# EAGLE board RPIBoy_Compute_1_3 (EAGLE 9.4.0), part 1 of 2
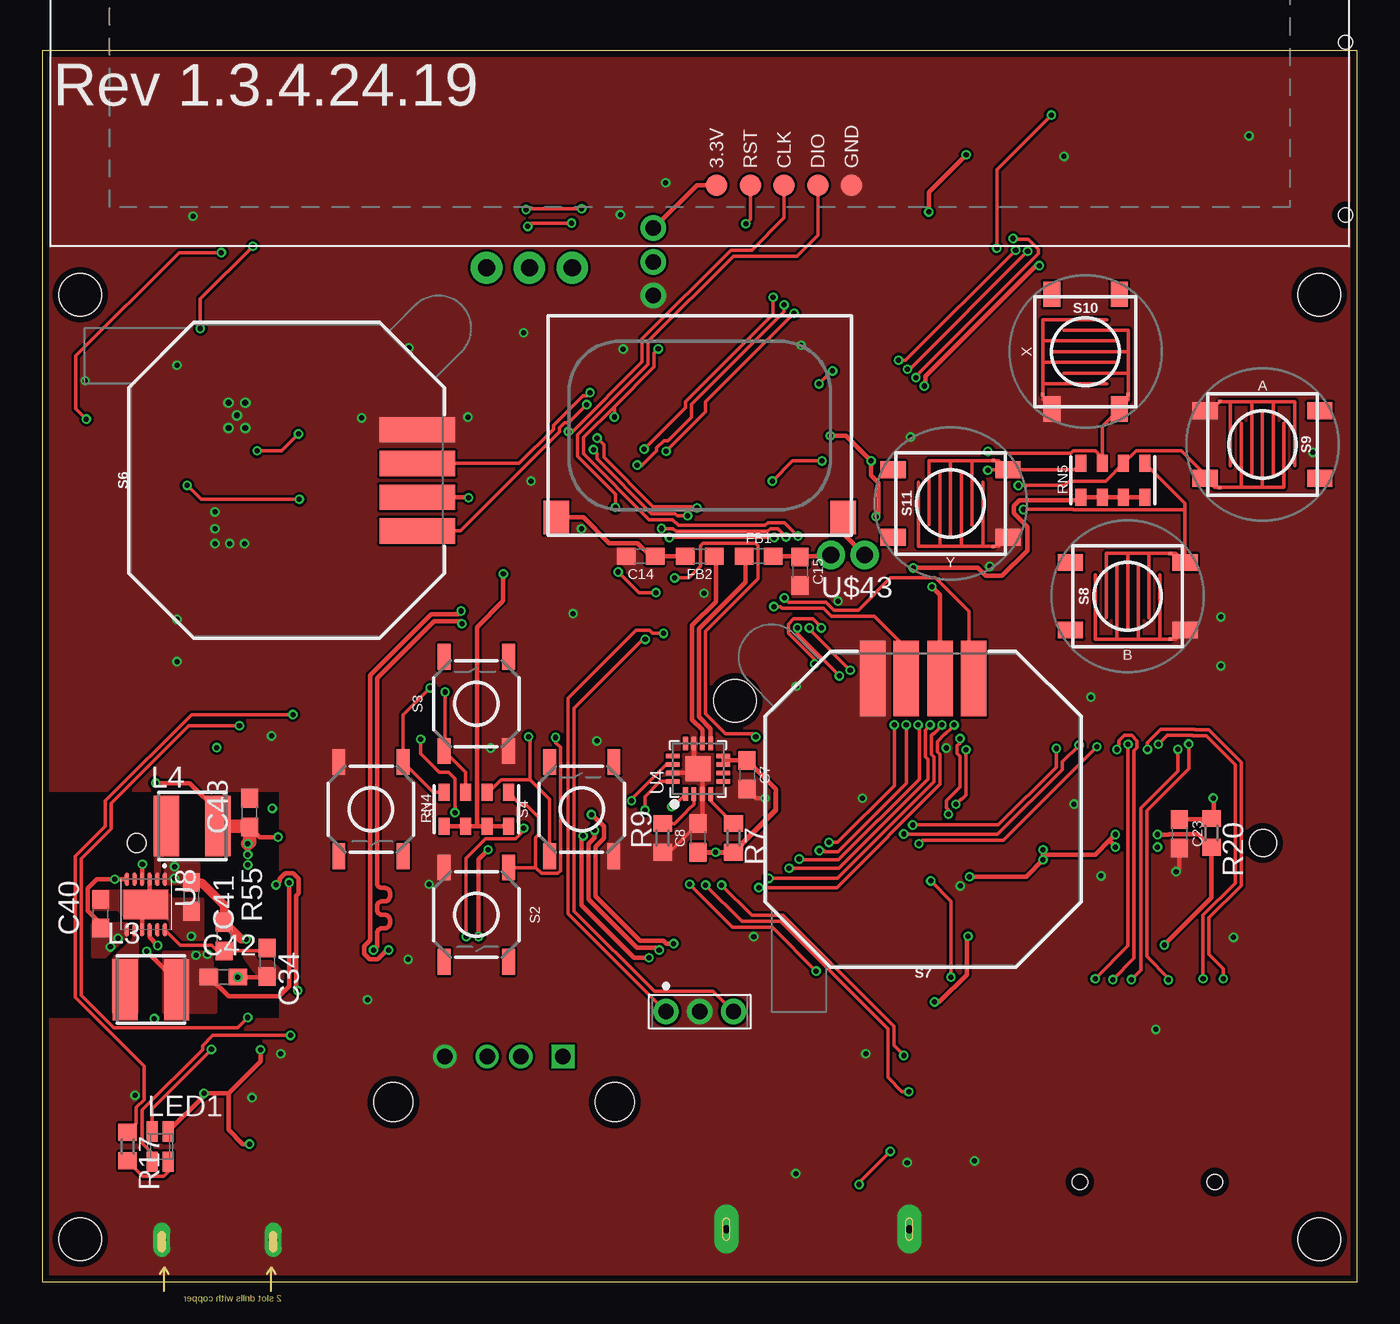
[diagram p0: board, top side]
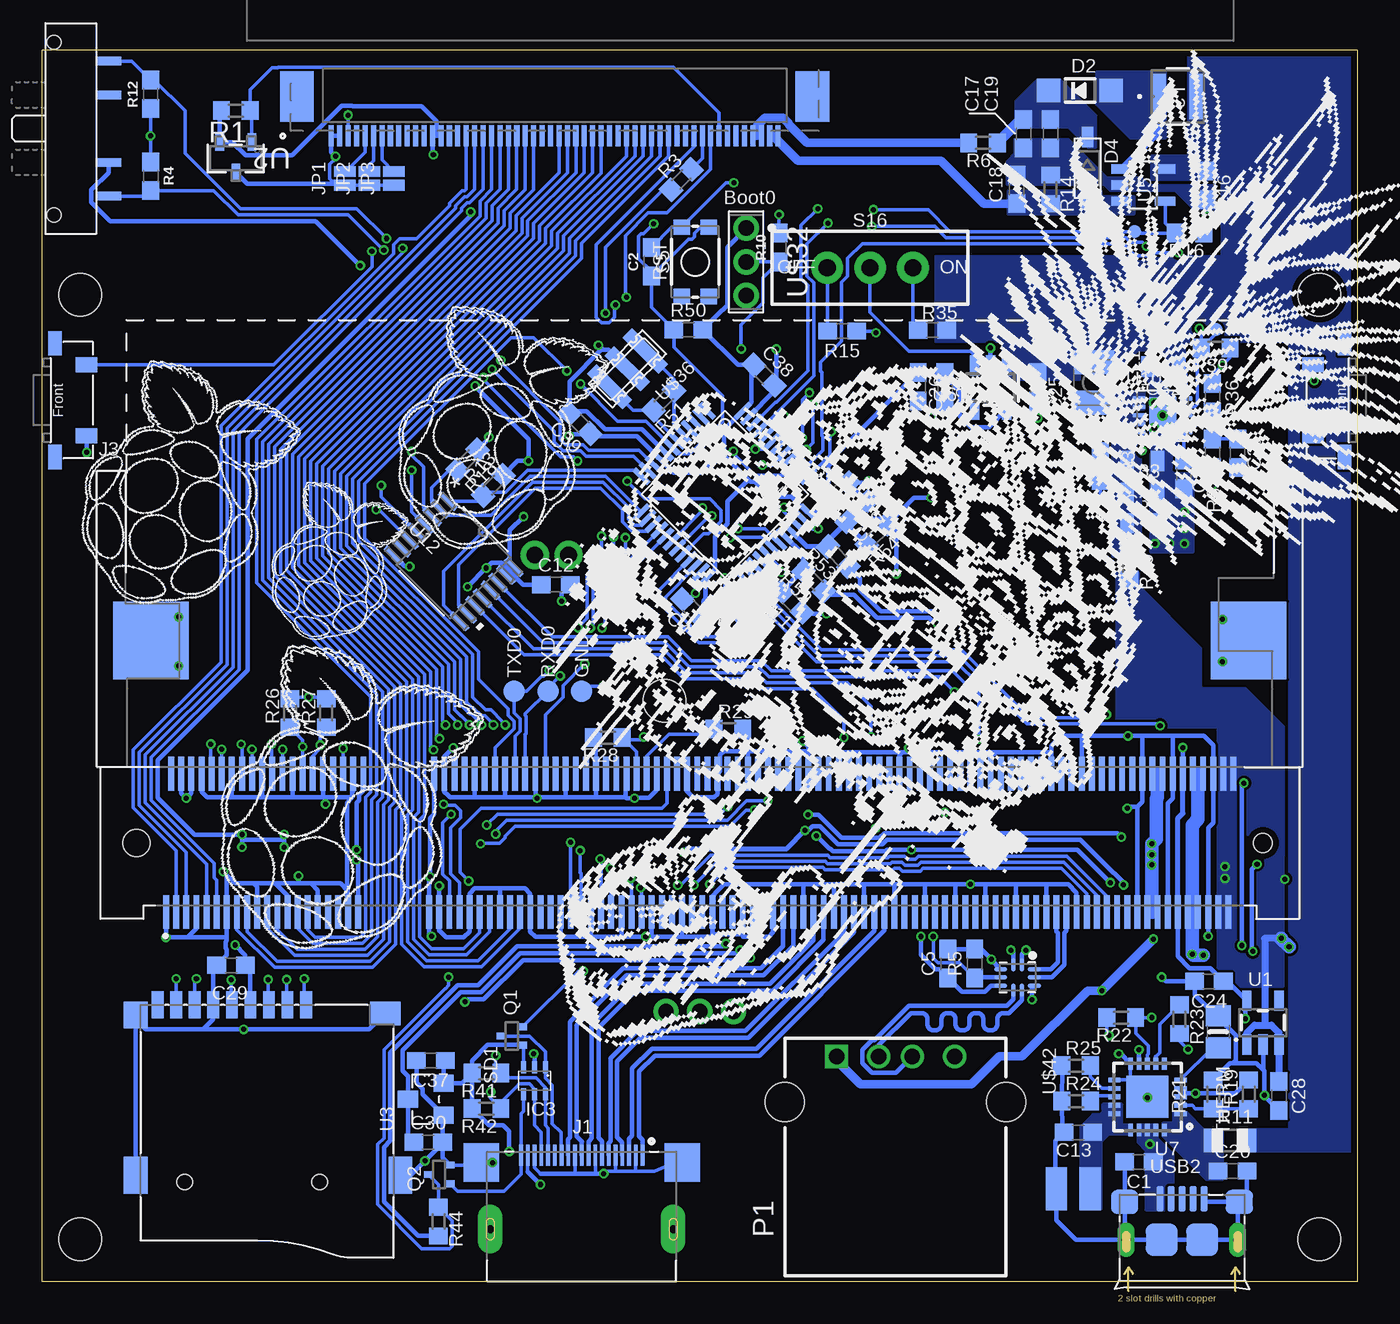
[diagram p1: board, bottom side, seen from below]

Size 78 x 73 mm. Coordinates in mm from the lower left corner, seen from the top.
Outline: 0,0 78,0 78,73 0,73 0,0
Copper layers (1*16): Top 0.035559375mm / dielectric 1.6mm / Bottom 0.035559375mm
Design rules "oshpark_2layer *": minimum track width 8mil, minimum drill 0.3mm, track to track 6mil, track to pad 6mil, pad to pad 6mil, via to via 6mil, smd to smd 6mil, copper to edge 15mil, drill to drill 6mil, minimum pad ring 5mil, minimum via ring 5mil, stop-mask expansion 2.5mil, vias tented up to drill 0mil, thermal gap 10mil
Net classes: 1 diff_pair: width 0.254 mm
Holes 2.5 mm at 2.25,2.5 75.75,2.5 2.25,58.5 75.75,58.5 41.09,34.42
tKeepout: area -0.5,0 to 4.5,5; area 73.5,0 to 78.5,5; area -0.3,56 to 4.7,61; area 73.3,56 to 78.3,61
bKeepout: area 0.1,56.4 to 4.3,60.6; area 73.7,56.4 to 77.9,60.6; area -0.5,0 to 4.5,5; area 73.5,0 to 78.5,5

## Footprints (pad centres in the part's own frame; a part is rotated, then mirrored left to right if it is on the bottom)
TACTILE_SWITCH_6X6.5MM = smd 1.5 x 1: A -3.4,2; A' 3.4,2; B -3.4,-2; B' 3.4,-2
0603 = smd 1.1 x 1: 1 -0.85,0; 2 0.85,0
0805 = smd 0.8 x 1.2: 1 -0.9,0; 2 0.9,0
SOD-123 = smd 1.4 x 1.4: A 1.85,0; C -1.85,0
SOD-123' = smd 1.2 x 0.7: A 1.85,0; C -1.85,0
LQFP48 = smd 0.3 x 1.2: 1 -2.75,-4.25; 2 -2.25,-4.25; 3 -1.75,-4.25; 4 -1.25,-4.25; 5 -0.75,-4.25; 6 -0.25,-4.25; 7 0.25,-4.25; 8 0.75,-4.25; 9 1.25,-4.25; 10 1.75,-4.25; 11 2.25,-4.25; 12 2.75,-4.25; 25 2.75,4.25; 26 2.25,4.25; 27 1.75,4.25; 28 1.25,4.25; 29 0.75,4.25; 30 0.25,4.25; 31 -0.25,4.25; 32 -0.75,4.25; 33 -1.25,4.25; 34 -1.75,4.25; 35 -2.25,4.25; 36 -2.75,4.25 | smd 1.2 x 0.3: 13 4.25,-2.75; 14 4.25,-2.25; 15 4.25,-1.75; 16 4.25,-1.25; 17 4.25,-0.75; 18 4.25,-0.25; 19 4.25,0.25; 20 4.25,0.75; 21 4.25,1.25; 22 4.25,1.75; 23 4.25,2.25; 24 4.25,2.75; 37 -4.25,2.75; 38 -4.25,2.25; 39 -4.25,1.75; 40 -4.25,1.25; 41 -4.25,0.75; 42 -4.25,0.25; 43 -4.25,-0.25; 44 -4.25,-0.75; 45 -4.25,-1.25; 46 -4.25,-1.75; 47 -4.25,-2.25; 48 -4.25,-2.75
SOT363-INFINION = smd 0.3 x 0.7: 1 -0.65,-0.8; 2 0,-0.8; 3 0.65,-0.8; 4 0.65,0.8; 5 0,0.8; 6 -0.65,0.8
TE_2013978-1 = smd 0.22 x 1.25: 1 3.6,4.375; 2 3.2,4.375; 3 2.8,4.375; 4 2.4,4.375; 5 2,4.375; 6 1.6,4.375; 7 1.2,4.375; 8 0.8,4.375; 9 0.4,4.375; 10 0,4.375; 11 -0.4,4.375; 12 -0.8,4.375; 13 -1.2,4.375; 14 -1.6,4.375; 15 -2,4.375; 16 -2.4,4.375; 17 -2.8,4.375; 18 -3.2,4.375; 19 -3.6,4.375 | smd 2.1 x 2.3: SH1 -5.95,3.95; SH2 5.95,3.95 | drill 0.45 pad 1.45 long: SH3 -5.425,0; SH4 5.425,0
TE_1473005-4 = smd 0.35 x 2: 1 -31.65,-4.1; 2 -31.35,4.1; 3 -31.05,-4.1; 4 -30.75,4.1; 5 -30.45,-4.1; 6 -30.15,4.1; 7 -29.85,-4.1; 8 -29.55,4.1; 9 -29.25,-4.1; 10 -28.95,4.1; 11 -28.65,-4.1; 12 -28.35,4.1; 13 -28.05,-4.1; 14 -27.75,4.1; 15 -27.45,-4.1; 16 -27.15,4.1; 17 -26.85,-4.1; 18 -26.55,4.1; 19 -26.25,-4.1; 20 -25.95,4.1; 21 -25.65,-4.1; 22 -25.35,4.1; 23 -25.05,-4.1; 24 -24.75,4.1; 25 -24.45,-4.1; 26 -24.15,4.1; 27 -23.85,-4.1; 28 -23.55,4.1; 29 -23.25,-4.1; 30 -22.95,4.1; 31 -22.65,-4.1; 32 -22.35,4.1; 33 -22.05,-4.1; 34 -21.75,4.1; 35 -21.45,-4.1; 36 -21.15,4.1; 37 -20.85,-4.1; 38 -20.55,4.1; 39 -20.25,-4.1; 40 -19.95,4.1; 41 -16.05,-4.1; 42 -15.75,4.1; 43 -15.45,-4.1; 44 -15.15,4.1; 45 -14.85,-4.1; 46 -14.55,4.1; 47 -14.25,-4.1; 48 -13.95,4.1; 49 -13.65,-4.1; 50 -13.35,4.1; 51 -13.05,-4.1; 52 -12.75,4.1; 53 -12.45,-4.1; 54 -12.15,4.1; 55 -11.85,-4.1; 56 -11.55,4.1; 57 -11.25,-4.1; 58 -10.95,4.1; 59 -10.65,-4.1; 60 -10.35,4.1; 61 -10.05,-4.1; 62 -9.75,4.1; 63 -9.45,-4.1; 64 -9.15,4.1; 65 -8.85,-4.1; 66 -8.55,4.1; 67 -8.25,-4.1; 68 -7.95,4.1; 69 -7.65,-4.1; 70 -7.35,4.1; 71 -7.05,-4.1; 72 -6.75,4.1; 73 -6.45,-4.1; 74 -6.15,4.1; 75 -5.85,-4.1; 76 -5.55,4.1; 77 -5.25,-4.1; 78 -4.95,4.1; 79 -4.65,-4.1; 80 -4.35,4.1; 81 -4.05,-4.1; 82 -3.75,4.1; 83 -3.45,-4.1; 84 -3.15,4.1; 85 -2.85,-4.1; 86 -2.55,4.1; 87 -2.25,-4.1; 88 -1.95,4.1; 89 -1.65,-4.1; 90 -1.35,4.1; 91 -1.05,-4.1; 92 -0.75,4.1; 93 -0.45,-4.1; 94 -0.15,4.1; 95 0.15,-4.1; 96 0.45,4.1; 97 0.75,-4.1; 98 1.05,4.1; 99 1.35,-4.1; 100 1.65,4.1; 101 1.95,-4.1; 102 2.25,4.1; 103 2.55,-4.1; 104 2.85,4.1; 105 3.15,-4.1; 106 3.45,4.1; 107 3.75,-4.1; 108 4.05,4.1; 109 4.35,-4.1; 110 4.65,4.1; 111 4.95,-4.1; 112 5.25,4.1; 113 5.55,-4.1; 114 5.85,4.1; 115 6.15,-4.1; 116 6.45,4.1; 117 6.75,-4.1; 118 7.05,4.1; 119 7.35,-4.1; 120 7.65,4.1; 121 7.95,-4.1; 122 8.25,4.1; 123 8.55,-4.1; 124 8.85,4.1; 125 9.15,-4.1; 126 9.45,4.1; 127 9.75,-4.1; 128 10.05,4.1; 129 10.35,-4.1; 130 10.65,4.1; 131 10.95,-4.1; 132 11.25,4.1; 133 11.55,-4.1; 134 11.85,4.1; 135 12.15,-4.1; 136 12.45,4.1; 137 12.75,-4.1; 138 13.05,4.1; 139 13.35,-4.1; 140 13.65,4.1; 141 13.95,-4.1; 142 14.25,4.1; 143 14.55,-4.1; 144 14.85,4.1; 145 15.15,-4.1; 146 15.45,4.1; 147 15.75,-4.1; 148 16.05,4.1; 149 16.35,-4.1; 150 16.65,4.1; 151 16.95,-4.1; 152 17.25,4.1; 153 17.55,-4.1; 154 17.85,4.1; 155 18.15,-4.1; 156 18.45,4.1; 157 18.75,-4.1; 158 19.05,4.1; 159 19.35,-4.1; 160 19.65,4.1; 161 19.95,-4.1; 162 20.25,4.1; 163 20.55,-4.1; 164 20.85,4.1; 165 21.15,-4.1; 166 21.45,4.1; 167 21.75,-4.1; 168 22.05,4.1; 169 22.35,-4.1; 170 22.65,4.1; 171 22.95,-4.1; 172 23.25,4.1; 173 23.55,-4.1; 174 23.85,4.1; 175 24.15,-4.1; 176 24.45,4.1; 177 24.75,-4.1; 178 25.05,4.1; 179 25.35,-4.1; 180 25.65,4.1; 181 25.95,-4.1; 182 26.25,4.1; 183 26.55,-4.1; 184 26.85,4.1; 185 27.15,-4.1; 186 27.45,4.1; 187 27.75,-4.1; 188 28.05,4.1; 189 28.35,-4.1; 190 28.65,4.1; 191 28.95,-4.1; 192 29.25,4.1; 193 29.55,-4.1; 194 29.85,4.1; 195 30.15,-4.1; 196 30.45,4.1; 197 30.75,-4.1; 198 31.05,4.1; 199 31.35,-4.1; 200 31.65,4.1 | smd 4.5 x 4.6: S1 -32.55,12; S2 32.55,12 | hole 1.6: -33.4,0 | hole 1.1: 33.4,0
SMT-JUMPER_2_NO_NO-SILK = smd 0.635 x 1.27: 1 -0.406,0; 2 0.406,0
L2825P = smd 1.4 x 2.4: 1 -1.2,0; 2 1.2,0
IND_TAIYO_NR3015 = smd 0.8 x 2.692: 1 -1.099,0; 2 1.099,0
INDP4040X180N = smd 1.5 x 3.6: 1 -1.525,0; 2 1.525,0
GM1WA55311A = smd 0.65 x 1.2: 1 -0.475,0.9; 2 -0.475,-0.9; 3 0.475,-0.9; 4 0.475,0.9
OST_USB-A1HSW6 = drill 0.92 square: 1 -3.5,6.51 | drill 0.92: 2 -1,6.51; 3 1,6.51; 4 3.5,6.51 | hole 2.3: -6.57,3.8; 6.57,3.8
SOT523 = smd 0.4 x 0.5: 1 -0.55,-0.65; 2 0.55,-0.65; 3 0,0.65
R0603 = smd 1 x 1.1: 1 -0.85,0; 2 0.85,0
R0805 = smd 1.1 x 1.4: 1 -1,0; 2 1,0
0805-ARV = smd 0.65 x 1: 1 -1.905,-1; 2 -0.635,-1; 3 0.635,-1; 4 1.905,-1; 5 1.905,1; 6 0.635,1; 7 -0.635,1; 8 -1.905,1
TACTILE_SWITCH_SMD_5.2MM = smd 1.524 x 0.762: 1 -2.794,1.905; 2 2.794,1.905; 3 -2.794,-1.905; 4 2.794,-1.905
TACTILE_SWITCH_SMD_4.6X2.8MM = smd 0.9 x 1: 1 -2.05,-0.8; 2 2.05,-0.8; 3 2.05,0.8; 4 -2.05,0.8
JOYSTICK-PSP1000 = smd 1.5 x 4.5: GND -3,7.75; VCC 1,7.75; X 3,7.75; Y -1,7.75
BUTTON-CONDUCTIVE = smd 0.203 x 0.203: 1 2.54,2.54; 2 2.54,-2.54
SWITCH_SPDT_PTH_11.6X4.0MM = drill 1.016 pad 1.88: 1 0,2.54; 2 0,0; 3 0,-2.54
MICRO-SD9+4P-SMD-16.1X14.5X1.85MM = smd 1.6 x 0.7: 1 0,2.25; 2 0,1.15; 3 0,0.05; 4 0,-1.05; 5 0,-2.15; 6 0,-3.25; 7 0,-4.35; 8 0,-5.45; 9 0,-6.55 | smd 1.6 x 1.4: G1 0.6,-7.85 | smd 2.2 x 1.4: G2 10.1,-7.85; G3 10.1,7.85 | smd 1.4 x 1.8: G4 0.5,6.95 | hole 0.9: 10.5,-4.95; 10.5,3.05
0805-NO = smd 1.24 x 1.5: 1 -0.95,0; 2 0.95,0
PAD.03X.03 = smd 0.762 x 0.762: P$1 0,0
PAD.03X.05 = smd 1.27 x 1.27: P$1 0,0
SOT23-5 = smd 0.55 x 1.2: 1 -0.95,-1.3; 2 0,-1.3; 3 0.95,-1.3; 4 0.95,1.3; 5 -0.95,1.3
DBZ3-L = smd 0.508 x 1.016: 1 -0.95,-0.965; 2 0.95,-0.965; 3 0,0.832
SOT-23 = smd 1.016 x 1.2: 1 -0.95,-1.06; 2 0.95,-1.06; 3 0,1.06
QFN16_3MM = smd 0.8 x 0.28: 1 -1.5,0.75; 2 -1.5,0.25; 3 -1.5,-0.25; 4 -1.5,-0.75; 9 1.5,-0.75; 10 1.5,-0.25; 11 1.5,0.25; 12 1.5,0.75 | smd 0.28 x 0.8: 5 -0.75,-1.5; 6 -0.25,-1.5; 7 0.25,-1.5; 8 0.75,-1.5; 13 0.75,1.5; 14 0.25,1.5; 15 -0.25,1.5; 16 -0.75,1.5 | smd 1.5 x 1.5: THERMAL 0,0
SOT23-5@1 = smd 0.55 x 1.2: 1 -0.95,-1.3; 2 0,-1.3; 3 0.95,-1.3; 4 0.95,1.3; 5 -0.95,1.3
QFN20_4MM = smd 0.73 x 0.28: P$1 -1.965,1; P$2 -1.965,0.5; P$3 -1.965,0; P$4 -1.965,-0.5; P$5 -1.965,-1; P$11 1.965,-1; P$12 1.965,-0.5; P$13 1.965,0; P$14 1.965,0.5; P$15 1.965,1 | smd 0.28 x 0.73: P$6 -1,-1.965; P$7 -0.5,-1.965; P$8 0,-1.965; P$9 0.5,-1.965; P$10 1,-1.965; P$16 1,1.965; P$17 0.5,1.965; P$18 0,1.965; P$19 -0.5,1.965; P$20 -1,1.965 | smd 2.5 x 2.5: P$21 0,0
SON45P300X300X80-13N = smd 0.8 x 0.25: 1 -1.5,1.125; 2 -1.5,0.675; 3 -1.5,0.225; 4 -1.5,-0.225; 5 -1.5,-0.675; 6 -1.5,-1.125; 7 1.5,-1.125; 8 1.5,-0.675; 9 1.5,-0.225; 10 1.5,0.225; 11 1.5,0.675; 12 1.5,1.125 | smd 1.75 x 2.65: 13 0,0
SON50P300X300X100-10N = smd 0.76 x 0.26: 1 -1.385,1; 2 -1.385,0.5; 3 -1.385,0; 4 -1.385,-0.5; 5 -1.385,-1; 6 1.385,-1; 7 1.385,-0.5; 8 1.385,0; 9 1.385,0.5; 10 1.385,1 | smd 1.6 x 2.15: 11 0,0 | drill 0.35 pad 0.61: P$1 0,0; P$2 0.5,0.75; P$3 -0.5,0.75; P$4 -0.5,-0.75; P$5 0.5,-0.75
PW16-L = smd 1.372 x 0.305: 1 -2.769,2.275; 2 -2.769,1.625; 3 -2.769,0.975; 4 -2.769,0.325; 5 -2.769,-0.325; 6 -2.769,-0.975; 7 -2.769,-1.625; 8 -2.769,-2.275; 9 2.769,-2.275; 10 2.769,-1.625; 11 2.769,-0.975; 12 2.769,-0.325; 13 2.769,0.325; 14 2.769,0.975; 15 2.769,1.625; 16 2.769,2.275
3.5_TFT_DISP = smd 2 x 3 bottom: 055 6.69,19.755; 056 -23.89,19.755 | smd 0.3 x 1.25 bottom: P$1 4.65,22.08; P$2 4.15,22.08; P$3 3.65,22.08; P$4 3.15,22.08; P$5 2.65,22.08; P$6 2.15,22.08; P$7 1.65,22.08; P$8 1.15,22.08; P$9 0.65,22.08; P$10 0.15,22.08; P$11 -0.35,22.08; P$12 -0.85,22.08; P$13 -1.35,22.08; P$14 -1.85,22.08; P$15 -2.35,22.08; P$16 -2.85,22.08; P$17 -3.35,22.08; P$18 -3.85,22.08; P$19 -4.35,22.08; P$20 -4.85,22.08; P$21 -5.35,22.08; P$22 -5.85,22.08; P$23 -6.35,22.08; P$24 -6.85,22.08; P$25 -7.35,22.08; P$26 -7.85,22.08; P$27 -8.35,22.08; P$28 -8.85,22.08; P$29 -9.35,22.08; P$30 -9.85,22.08; P$31 -10.35,22.08; P$32 -10.85,22.08; P$33 -11.35,22.08; P$34 -11.85,22.08; P$35 -12.35,22.08; P$36 -12.85,22.08; P$37 -13.35,22.08; P$38 -13.85,22.08; P$39 -14.35,22.08; P$40 -14.85,22.08; P$41 -15.35,22.08; P$42 -15.85,22.08; P$43 -16.35,22.08; P$44 -16.85,22.08; P$45 -17.35,22.08; P$46 -17.85,22.08; P$47 -18.35,22.08; P$48 -18.85,22.08; P$49 -19.35,22.08; P$50 -19.85,22.08; P$51 -20.35,22.08; P$52 -20.85,22.08; P$53 -21.35,22.08; P$54 -21.85,22.08
SPEAKER = smd 1.5 x 2: P$1 -8.5,-5.45; P$2 8.5,-5.45
SPRING-SWITCH = smd 0.5 x 1.5: 1 -4,0.75; 2 -2,0.75; 3 2,0.75; 4 4,0.75 | hole 0.8: -5.125,-2.5; 5.125,-2.5
2PINSMD = smd 1.27 x 2.54: P$1 0,0; P$2 2,0
HDRV3W50P200_1X3_560X200X550B = drill 0.907 pad 1.507: 1 -2,0; 2 0,0; 3 2,0
E-SWITCH = smd 0.9 x 1.27: A 2.1,-0.885; A' -2.1,-0.885 | smd 1.45 x 0.8: P$1 3.375,1; P$2 -3.375,1
CSTCR-G = smd 0.8 x 3: 1 -1.5,0; 2 0,0; 3 1.5,0
QFN50P160X210X55-10 = smd 0.798 x 0.27: 1 -0.757,0.25; 2 -0.757,-0.25; 6 0.757,-0.25; 7 0.757,0.25 | smd 0.27 x 0.798: 3 -0.5,-1.007; 4 0,-1.007; 5 0.5,-1.007; 8 0.5,1.007; 9 0,1.007; 10 -0.5,1.007
1X02_2MM = drill 1 pad 1.676: 1 0,0; 2 2,0
MICRO-USB5+6P-SMD-0.65-B = smd 0.4 x 1.5: 1 -1.3,-0.25; 2 -0.65,-0.25; 3 0,-0.25; 4 0.65,-0.25; 5 1.3,-0.25 | smd 1.6 x 1.4: S1 -3.4,-0.427; S6 3.4,-0.427 | drill 0.508 pad 1.016 long: S2 -3.3,-2.675; S5 3.3,-2.675 | smd 1.9 x 1.9: S3 -1.2,-2.675; S4 1.2,-2.675

## Placement (x,y rotation side)
A  TACTILE_SWITCH_6X6.5MM  [TACTILE_SWITCH_6X6.5MM]  72.38,49.62 0 top
B  TACTILE_SWITCH_6X6.5MM  [TACTILE_SWITCH_6X6.5MM]  64.38,40.62 180 top
BT1  LIPO-OUTLINE25002  [LIPO2-2500]  7.35,125.05 180 bottom  (outside the outline)
C1  10uF  [0603]  12.95,7.1 180 bottom
C2  100nF  [0603]  41.87,60.45 90 bottom
C3  1uF  [0603]  30.78,46.75 45 bottom
C4  1uF  [0603]  39.43,39.84 135 bottom
C5  100nF  [0603]  24.27,18.85 90 bottom
C7  0.1uF  [0603]  41.8,30.05 270 top
C8  10uF  [0603]  38.9,26.3 90 top
C10  47pF  [0603]  29.66,45.66 225 bottom
C11  47pF  [0603]  33.54,40.29 135 bottom
C12  10uF  [0603]  47.54,41.31 0 bottom
C13  10uF  [0603]  16.55,8.85 180 bottom
C14  220pF  [0603]  35.5,43 180 top
C15  220pF  [0603]  44.95,42.1 270 top
C16  10uF  [0603]  8.95,65 270 bottom
C17  1.0uF  [0603]  19.8,68.05 270 bottom
C18  0.1uF  [0603]  20.2,64.75 90 bottom
C19  1.0uF  [0603]  18.2,68.05 270 bottom
C20  10uF  [0603]  7.4,6.55 0 bottom
C21  18pF  [0603]  7.1,49.1 90 bottom
C23  10uF  [0603]  67.45,26.55 270 top
C24  4.7uF  [0603]  8.8,17.8 180 bottom
C25  10uF  [0603]  18.95,53.05 270 bottom
C26  10uF  [0603]  26.05,53.05 270 bottom
C27  10uF  [0603]  24.45,53.05 270 bottom
C28  1uF  [0603]  4.65,11 270 bottom
C29  4.7uF  [0603]  66.8,18.75 180 bottom
C30  100nF  [0603]  55.1,8.25 0 bottom
C31  22uF  [0805]  12.75,48.65 0 bottom
C32  22uF  [0805]  11.5,54.25 180 bottom
C33  22uF  [0805]  12.75,46.75 0 bottom
C34  0.1uF  [0603]  13.35,18.93 270 top
C35  10nF  [0603]  10.3,47.85 270 bottom
C36  22uF  [0805]  12.75,44.95 0 bottom
C37  100nF  [0603]  54.95,13.1 180 bottom
C38  100nF  [0603]  35.19,53.74 315 bottom
C39  100nF  [0603]  46.11,50.88 135 bottom
C40  10uF  [0603]  3.47,21.8 90 top
C41  10uF  [0603]  8.85,22.8 270 top
C42  10uF  [0603]  10.75,18.05 0 top
C43  10uF  [0603]  12.3,27.8 90 top
D2  MBR0540  [SOD-123]  16.45,70.6 0 bottom
D4  MMSZ4706T1GOSCT  [SOD-123']  16,66 270 bottom
FB1  30Ω/1.8A  [0603]  42.5,43 0 top
FB2  30Ω/1.8A  [0603]  39,43 180 top
FRAME1  FRAME-LEDGER  [CREATIVE_COMMONS]  96.15,46.2 90 top  (outside the outline)
FRAME2  FRAME-LEDGER  [CREATIVE_COMMONS]  96.15,46.1 90 top  (outside the outline)
IC2  STM32F103C8T  [LQFP48]  37.5,46.67 225 bottom
IC3  PESD3V3L5UYSOT363  [SOT363-INFINION]  48.8,11.9 180 bottom
J1  2013978-1  [TE_2013978-1]  46,3.1 0 bottom
J3  1473005-4  [TE_1473005-4]  39,26 0 bottom
JP1  JUMPER-SMT_2_NO_NO-SILK  [SMT-JUMPER_2_NO_NO-SILK]  60.05,65.4 90 bottom
JP2  JUMPER-SMT_2_NO_NO-SILK  [SMT-JUMPER_2_NO_NO-SILK]  58.6,65.4 90 bottom
JP3  JUMPER-SMT_2_NO_NO-SILK  [SMT-JUMPER_2_NO_NO-SILK]  57.15,65.4 90 bottom
L1  1uH  [L2825P]  15.6,53.3 270 bottom
L2  NR3015T6R8M  [IND_TAIYO_NR3015]  10.65,70.25 0 bottom
L3  SRN4018  [INDP4040X180N]  6.45,17.3 0 top
L4  SRN4018  [INDP4040X180N]  8.9,27 0 top
LED1  GM1WA55311A  [GM1WA55311A]  7,8 0 top
P1  USB-A1HSW6  [OST_USB-A1HSW6]  27.39,6.83 0 bottom
Q1  MOSFET-NCHANNELSOT523  [SOT523]  50.15,14.55 90 bottom
Q2  MOSFET-NCHANNELSOT523  [SOT523]  54.45,6.35 90 bottom
R1  10K  [R0603]  66.52,69.42 180 bottom
R3  22  [R0603]  40.1,65.33 45 bottom
R4  100k  [0603]  71.56,65.53 270 bottom
R5  10k  [0603]  22.7,18.85 90 bottom
R6  0  [R0603]  22.2,67.5 180 bottom
R7  1M  [R0603]  41,26.3 270 top
R8  1k  [0603]  36.92,39.88 135 bottom
R9  100K  [R0603]  36.8,26.3 90 top
R10  10K  [0603]  34.3,61.3 90 bottom
R11  [R0805]  7.55,8.35 0 bottom
R12  100k  [0603]  71.56,70.38 90 bottom
R13  10k  [R0603]  51.25,47.2 45 bottom
R14  12Ω  [R0603]  18.2,64.75 270 bottom
R15  100K  [0603]  30.55,56.35 180 bottom
R16  100K  [R0603]  9.95,62.15 180 bottom
R17  1K  [R0603]  5.07,8 270 top
R18  10k  [R0603]  52.76,48.71 225 bottom
R19  270K  [R0603]  6.45,11.1 90 bottom
R20  0  [R0603]  69.35,26.6 270 top
R21  100K  [R0603]  8.55,11.1 90 bottom
R22  1K  [R0603]  14,15.65 180 bottom
R23  1K  [R0603]  10.55,15.55 270 bottom
R24  1.0K  [R0603]  16.68,10.7 0 bottom
R25  100K  [R0603]  16.68,12.8 0 bottom
R26  100K  [R0603]  63.3,33.7 90 bottom
R27  100K  [R0603]  61.15,33.7 90 bottom
R28  100K  [R0603]  44.45,32.25 180 bottom
R29  100K  [R0603]  37.3,32.75 0 bottom
R35  100K  [0603]  25.2,56.4 0 bottom
R36  100k  [0603]  8.6,52.4 270 bottom
R37  402k  [0603]  8.6,49.1 270 bottom
R38  1M  [0603]  15.25,48.35 270 bottom
R39  100K  [R0603]  8.4,55.35 180 bottom
R40  0  [R0603]  13.55,42.5 270 bottom
R41  1.75k  [R0603]  51.65,12.35 180 bottom
R42  1.75k  [R0603]  51.65,10.25 180 bottom
R44  100K  [R0603]  54.5,3.55 270 bottom
R50  10k  [0603]  39.68,56.42 0 bottom
R51  1M  [R0603]  41.14,52.25 225 bottom
R52  22  [R0603]  32.24,41.53 135 bottom
R53  22  [R0603]  30.79,42.98 135 bottom
R54  1.5k  [R0603]  28.49,44.28 225 bottom
R55  100k  [0603]  10.8,20.45 90 top
RN4  1k  [0805-ARV]  25.75,28 0 top
RN5  1k  [0805-ARV]  63.5,47.5 0 top
S1  [TACTILE_SWITCH_SMD_5.2MM]  19.5,28 270 top
S2  [TACTILE_SWITCH_SMD_5.2MM]  25.75,21.75 270 top
S3  [TACTILE_SWITCH_SMD_5.2MM]  25.75,34.25 90 top
S4  [TACTILE_SWITCH_SMD_5.2MM]  32,28 90 top
S5  [TACTILE_SWITCH_SMD_4.6X2.8MM]  39.27,60.45 90 bottom
S6  JOYSTICK_SLIDE  [JOYSTICK-PSP1000]  14.5,47.5 270 top
S7  JOYSTICK_SLIDE  [JOYSTICK-PSP1000]  52.25,28 0 top
S8  BUTTON-CONDUCTIVESMD  [BUTTON-CONDUCTIVE]  64.38,40.62 0 top
S9  BUTTON-CONDUCTIVESMD  [BUTTON-CONDUCTIVE]  72.38,49.62 180 top
S10  BUTTON-CONDUCTIVESMD  [BUTTON-CONDUCTIVE]  61.88,55.12 270 top
S11  BUTTON-CONDUCTIVESMD  [BUTTON-CONDUCTIVE]  53.88,46.12 0 top
S16  [SWITCH_SPDT_PTH_11.6X4.0MM]  28.9,60.1 270 bottom
SD1  ST-TF-003A  [MICRO-SD9+4P-SMD-16.1X14.5X1.85MM]  64.6,16.4 270 bottom
THERM  10K  [0805-NO]  8.25,14.8 270 bottom
TP1  TEST-POINT3  [PAD.03X.03]  8.38,56.45 270 bottom
TP2  TEST-POINT3  [PAD.03X.03]  13.2,62.25 180 bottom
TP3  TEST-POINT3X5  [PAD.03X.05]  40,65 0 top
TP4  TEST-POINT3X5  [PAD.03X.05]  50,35 0 bottom
TP5  TEST-POINT3X5  [PAD.03X.05]  48,35 0 bottom
TP6  TEST-POINT3X5  [PAD.03X.05]  46,35 0 bottom
TP8  TEST-POINT3X5  [PAD.03X.05]  48,65 0 top
TP9  TEST-POINT3X5  [PAD.03X.05]  46,65 0 top
TP10  TEST-POINT3X5  [PAD.03X.05]  44,65 0 top
TP11  TEST-POINT3X5  [PAD.03X.05]  42,65 0 top
U1  2.8V (AP7115-25SEG)  [SOT23-5]  5.6,15.35 0 bottom
U2  TLV863MDBZRDBZ3-L  [DBZ3-L]  66.52,66.59 180 bottom
U3  AP2331W  [SOT-23]  55.25,10.8 90 bottom
U4  MAX98357A  [QFN16_3MM]  38.9,30.4 90 top
U5  FAN5333BSX  [SOT23-5@1]  12.7,65 270 bottom
U6  AP2112-3.3  [SOT23-5]  21.75,53 180 bottom
U7  MCP73871  [QFN20_4MM]  12.45,10.95 180 bottom
U8  PAM2306AYPAA  [SON45P300X300X80-13N]  6.15,22.35 270 top
U10  TPS61232DRCR  [SON50P300X300X100-10N]  11.55,51.35 0 bottom
U12  SN74HC165PWRPW16-L  [PW16-L]  53.6,42.7 315 bottom
U$1  PINEAPPLE_SKULLSIDESKULL  [PINEAPPLE_SKULL_3]  42.92,28.66 321 bottom
U$2  3.5_TFT_DISP  [3.5_TFT_DISP]  39,90 180 top
U$7  SPEAKER  [SPEAKER]  39,50.75 0 top
U$8  JSM07011SAQNL  [SPRING-SWITCH]  74.8,68.35 270 bottom
U$24  2PINSMD  [2PINSMD]  17.85,5.5 0 bottom
U$32  1X03_2MM_HEADER  [HDRV3W50P200_1X3_560X200X550B]  36.25,60.45 270 bottom
U$34  E-SWITCH  [E-SWITCH]  76.25,52.25 90 bottom
U$35  E-SWITCH  [E-SWITCH]  1.75,52.25 270 bottom
U$36  [CSTCR-G]  43.29,54.11 225 bottom
U$40  RASPBERRYLARGE  [LG_RASPBERRY]  67.96,21.2 340 bottom
U$42  USB3740B_SWITCH  [QFN50P160X210X55-10]  20.15,18.02 270 bottom
U$43  1X02_2MM_HEADER  [1X02_2MM]  48.78,43.07 180 top
U$44  1X03_2MM_HEADER  [HDRV3W50P200_1X3_560X200X550B]  39,16 0 top
U$45  RASPBERRYMEDIUM  [RASPBERRY]  56.56,44.35 340 bottom
U$46  RASPBERRYSMALL  [SM_RASPBERRY]  63.81,38.51 340 bottom
U$48  RASPBERRYMEDIUM  [RASPBERRY]  75.65,41.44 335 bottom
USB2  10118193-0001LF  [MICRO-USB5+6P-SMD-0.65-B]  10.4,5.15 0 bottom
X  TACTILE_SWITCH_6X6.5MM  [TACTILE_SWITCH_6X6.5MM]  61.88,55.12 90 top
Y  TACTILE_SWITCH_6X6.5MM  [TACTILE_SWITCH_6X6.5MM]  53.88,46.12 180 top

## Library data of the parts
A B U$34 U$35 X Y = PCB Components
BT1 = SparkFun-Batteries
C1-C5 C8 C12-C16 C20 C23-C30 C37-C39 = SparkFun-Capacitors; PROD_ID: CAP-11015
C7 C18 = SparkFun-Capacitors; PROD_ID: CAP-00810
C10 C11 = SparkFun-Capacitors; PROD_ID: CAP-08913
C17 C19 = SparkFun-Capacitors; PROD_ID: CAP-00868
C21 C35 = SparkFun-Capacitors; PROD_ID: CAP-00867
C31-C33 C36 = SparkFun-Capacitors; PROD_ID: CAP-08402
C34 = SparkFun-Capacitors; CID: 67; PROD_ID: CAP-00810
C40-C43 = SparkFun-Capacitors; CID: 351; PROD_ID: CAP-11015
D2 THERM U4-U7 = microbuilder
D4 R11 U$36 = adafruit
FB1 FB2 = SparkFun-Coils; PROD_ID: NDUC-07859
FRAME1 FRAME2 = SparkFun-Aesthetics
IC2 = micro-stm_v3
IC3 = osborn; CID: 360
J1 = 2013978-1; COMMENT: 2013978-1; DESCRIPTION: Conn HDMI RCP 19 POS 0.4mm Solder RA SMD 19 Terminal 1 Port Embossed T/R; DIGI-KEY_PART_NUMBER: A107963CT-ND; DIGI-KEY_PURCHASE_URL: https://www.digikey.com/product-detail/en/te-connectivity-amp-connectors/2013978-1/A107963CT-ND/4021913?utm_source=snapeda&utm_medium=aggregator&utm_campaign=symbol; MF: TE Connectivity; MP: 2013978-1; PACKAGE: None; TE_PURCHASE_URL: https://www.te.com/usa-en/product-2013978-1.html?te_bu=Cor&te_type=disp&te_campaign=seda_glo_cor-seda-global-disp-prtnr-fy19-seda-model-bom-cta_sma-317_1&elqCampaignId=32493
J3 = 1473005-4; CENTERLINE_PITCH: .6 mm[.024 in]; COMMENT: 1473005-4; DESCRIPTION: SEMI-HARD TRAY DDR2 SODIMM SOCKET 200P 5; DIGI-KEY_PART_NUMBER: A114851-ND; DIGI-KEY_PURCHASE_URL: https://www.digikey.com/product-detail/en/te-connectivity-amp-connectors/1473005-4/A114851-ND/2187756?utm_source=snapeda&utm_medium=aggregator&utm_campaign=symbol; MF: TE Connectivity; MP: 1473005-4; NUMBER_OF_POSITIONS: 200; PACKAGE: None; PRODUCT_TYPE: Socket; TE_PURCHASE_URL: https://www.te.com/usa-en/product-1473005-4.html?te_bu=Cor&te_type=disp&te_campaign=seda_glo_cor-seda-global-disp-prtnr-fy19-seda-model-bom-cta_sma-317_1&elqCampaignId=32493
JP1-JP3 = SparkFun-Jumpers
L1 = rcl; SPICEPREFIX: L
L2 = Inductor; MANUFACTURER_PART_NUMBER: NR3015T6R8M; VENDOR: TAIYO YUDEN
L3 L4 = SRN4018; CID: 352
LED1 = led
P1 = USB-A1HSW6; DESCRIPTION: Conn Usb Type a r/a White; DIGI-KEY_PART_NUMBER: ED2989-ND; DIGI-KEY_PURCHASE_URL: https://www.digikey.com/product-detail/en/on-shore-technology-inc/USB-A1HSW6/ED2989-ND/2677750?utm_source=snapeda&utm_medium=aggregator&utm_campaign=symbol; MF: On Shore; MP: USB-A1HSW6; PACKAGE: None
Q1 Q2 = osborn; CID: 359
R1 R3 R6 R7 R9 R14 R16 R17 R19-R29 R39-R42 R44 R51-R54 = rcl; SPICEPREFIX: R
R4 R5 R8 R10 R12 R15 R50 = SparkFun-Resistors; PROD_ID: RES-00824
R13 R18 = audio amplifier example
R35 = SparkFun-Resistors; PROD_ID: RES-00824; VALUE: 10k
R36 = SparkFun-Resistors; PROD_ID: RES-07828
R37 = SparkFun-Resistors; PROD_ID: RES-12024
R38 = SparkFun-Resistors
R55 = SparkFun-Resistors; CID: 157; PROD_ID: RES-07828
RN4 RN5 = SparkFun-Resistors; PROD_ID: RES-13020
S1-S4 = SparkFun-Switches; PROD_ID: SWCH-08247; SF_SKU: COM-08720
S5 = SparkFun-Switches; PROD_ID: SWCH-13065
S6 S7 = SparkFun-Switches; SF_SKU: COM-09426
S8-S11 = SparkFun-Switches
S16 = SparkFun-Switches; PROD_ID: SWCH-08261; SF_SKU: COM-00102
SD1 = Seeed-Connector; MPN: ST-TF-003A
TP1-TP6 TP8-TP11 = SparkFun-Connectors
U1 = SparkFun-IC-Power; PROD_ID: VREG-12457
U2 = TLV863-ResetOnPower; MANUFACTURER_PART_NUMBER: TLV863MDBZR; VENDOR: Texas Instruments
U3 = Seeed-IC; MPN: XC6206P332MR-G
U8 = PAM2306AYPAA; AVAILABILITY: Good; CID: 362; DESCRIPTION: IC REG BUCK ADJ 1A DL SYNC 12DFN; MF: Diodes Inc.; MP: PAM2306AYPAA; PACKAGE: WFDFN-12 Diodes Inc.; PRICE: 0.33 USD
U10 = TPS61232DRCR; DESCRIPTION: High Efficiency Synchronous Step Up Converter With 5A Switch 10-VSON -40 to 85; DIGI-KEY_PART_NUMBER: 296-44498-1-ND; DIGI-KEY_PURCHASE_URL: https://www.digikey.com/product-detail/en/texas-instruments/TPS61232DRCR/296-44498-1-ND/6110782?utm_source=snapeda&utm_medium=aggregator&utm_campaign=symbol; MF: Texas Instruments; MP: TPS61232DRCR; PACKAGE: VSON-10 Texas Instruments
U12 = 74hc165; MANUFACTURER_PART_NUMBER: SN74HC165PWR; VENDOR: Texas Instruments
U$1 U$40 U$45 U$46 U$48 = Custom_Bitmaps
U$2 = 3.5in-Tft
U$7 = mini_loud_speaker
U$8 = Custom-Switch
U$24 = 2mm Pitch smd pads
U$32 U$43 U$44 = 2mm_header_no_silk
U$42 = USB2.0_switch
USB2 = Seeed-Connector; MPN: 10118193-0001LF

## Nets
1.8V: C43.1 J3.183 J3.184 J3.185 J3.186 L4.2 R44.2 U8.10
2.8V: C24.1 J3.189 J3.190 U1.5
3.3V: C5.1 C29.1 C42.1 J3.39 J3.40 J3.41 J3.42 J3.191 J3.192 J3.193 J3.194 L3.2 R1.2 R20.2 SD1.4 U2.2 U8.4 U$2.P$41 U$2.P$42 U$42.5
5V: C7.1 C8.1 C28.1 C30.1 C40.1 C41.1 J3.197 J3.198 J3.199 J3.200 P1.1 R7.2 R40.2 R55.2 U1.1 U1.3 U3.3 U4.7 U4.8 U8.1 U8.6 U8.7
5V_EN: IC2.45 R39.2 TP1.P$1 U10.9
5V_PG: R38.1 U10.5
26: J3.87
27: J3.89
30: J3.34
32: J3.46
33: J3.48
34: J3.52
39: J3.66
40: J3.70
41: J3.72
42: J3.76
43: J3.78
45: J3.84 R29.1
+24V: R6.2 U$2.P$3 U$2.P$4
A: A.B RN5.6 S9.1 U12.5
B: B.B RN5.5 S8.1 U12.6
B0: U$2.P$12
B1: U$2.P$13
B2: J3.69 U$2.P$14
B3: J3.71 U$2.P$15
B4: J3.75 U$2.P$16
B5: J3.77 U$2.P$17
B6: J3.81 U$2.P$18
B7: J3.83 U$2.P$19
BCLK: J3.28 R26.1 U4.16
BLED: IC2.28 R17.1
BOOT0: IC2.44 J3.64 R10.1 U$32.2
C1: IC2.16 S7.X
C2: IC2.17 S7.Y
CAM0_C_N: J3.144
CAM0_C_P: J3.142
CAM0_D0_N: J3.138
CAM0_D0_P: J3.136
CAM0_D1_N: J3.150
CAM0_D1_P: J3.148
CAM1_C_N: J3.149
CAM1_C_P: J3.147
CAM1_D0_N: J3.161
CAM1_D0_P: J3.159
CAM1_D1_N: J3.155
CAM1_D1_P: J3.153
CAM1_D2_N: J3.143
CAM1_D2_P: J3.141
CAM1_D3_N: J3.137
CAM1_D3_P: J3.135
D_CLK: IC2.13 R18.2 U12.2
D_OUT: IC2.14 U12.9
DCLK: IC2.37 TP10.P$1
DDOWN: RN4.5 S2.1 U12.11
DE: J3.5 U$2.P$52
DIN: J3.36 U4.1
DIO: IC2.34 TP9.P$1
DISC: IC2.25 R5.1 U$42.4
DLEFT: RN4.8 S1.1 U12.14
DRIGHT: RN4.6 S4.1 U12.12
DUP: RN4.7 S3.1 U12.13
EMMC_DISABLE_N: J3.2
EMMC_EN_N_1V8: J3.90
EN: S16.2 U6.3
G0: U$2.P$20
G1: U$2.P$21
G2: J3.45 U$2.P$22
G3: J3.47 U$2.P$23
G4: J3.51 U$2.P$24
G5: J3.53 U$2.P$25
G6: J3.57 U$2.P$26
G7: J3.59 U$2.P$27
GAIN: R9.2 U4.2
GND: A.A B.A C1.2 C2.2 C3.2 C4.2 C5.2 C7.2 C8.2 C10.1 C11.1 C12.2 C13.2 C14.2 C15.2 C16.2 C17.2 C18.2 C19.2 C20.2 C23.2 C24.2 C25.2 C26.2 C27.2 C28.2 C29.2 C30.2 C31.2 C32.2 C33.2 C34.2 C35.2 C36.2 C37.2 C38.2 C39.2 C40.2 C41.2 C42.2 C43.2 IC2.8 IC2.23 IC2.35 IC2.47 IC3.2 J1.2 J1.5 J1.8 J1.11 J1.17 J1.SH1 J1.SH2 J1.SH3 J1.SH4 J3.1 J3.7 J3.8 J3.13 J3.14 J3.19 J3.20 J3.25 J3.26 J3.31 J3.32 J3.37 J3.38 J3.43 J3.44 J3.49 J3.50 J3.55 J3.56 J3.61 J3.62 J3.67 J3.68 J3.73 J3.74 J3.79 J3.80 J3.85 J3.86 J3.91 J3.92 J3.97 J3.98 J3.103 J3.104 J3.109 J3.110 J3.115 J3.116 J3.121 J3.122 J3.127 J3.133 J3.134 J3.139 J3.140 J3.145 J3.146 J3.151 J3.152 J3.157 J3.163 J3.164 J3.169 J3.170 J3.181 J3.182 J3.187 J3.188 J3.195 J3.196 J3.S1 J3.S2 JP1.1 JP2.1 JP3.1 P1.4 Q2.2 R4.1 R5.2 R9.1 R10.2 R12.1 R14.1 R15.1 R16.1 R18.1 R21.2 R24.1 R25.1 R26.2 R27.2 R28.2 R29.2 R36.1 R39.1 S1.3 S2.3 S3.3 S4.3 S5.3 S6.GND S7.GND S8.2 S9.2 S10.2 S11.2 SD1.6 SD1.G1 SD1.G2 SD1.G3 SD1.G4 THERM.1 TP6.P$1 TP8.P$1 U1.2 U2.3 U3.1 U4.3 U4.11 U4.15 U4.THERMAL U5.2 U6.2 U7.P$10 U7.P$11 U7.P$21 U8.3 U8.9 U8.13 U10.11 U10.P$1 U10.P$2 U10.P$3 U10.P$4 U10.P$5 U12.8 U$2.P$53 U$2.P$54 U$24.P$1 U$32.3 U$34.A' U$35.A' U$36.2 U$42.3 U$42.8 U$44.2 USB2.5 USB2.S1 USB2.S2 USB2.S3 USB2.S4 USB2.S5 USB2.S6 X.A Y.A
HDMI_CEC: J3.171 Q1.2
HDMI_CK_N [diff_pair]: J1.12 J3.111
HDMI_CK_P [diff_pair]: J1.10 J3.113
HDMI_D0_N [diff_pair]: J1.9 J3.117
HDMI_D0_P [diff_pair]: J1.7 J3.119
HDMI_D1_N [diff_pair]: J1.6 J3.123
HDMI_D1_P [diff_pair]: J1.4 J3.125
HDMI_D2_N [diff_pair]: J1.3 J3.129
HDMI_D2_P [diff_pair]: J1.1 J3.131
HDMI_HPD_N_1V8: J3.88 Q2.3 R44.1
HDMI_SCL: IC3.6 J1.15 J3.175 R41.1
HDMI_SDA: IC3.5 J1.16 J3.173 R42.1
IN: IC2.15 U12.10
LBO: IC2.27 R22.1 U7.P$8
LCD_HSYNC: J3.11 U$2.P$36
LCD_VSYNC: J3.9 U$2.P$37
LD: IC2.12 R13.1 U12.1
LEDK: C18.1 D4.A R14.2 U5.3 U$2.P$1 U$2.P$2
LRCLK: J3.30 R27.1 U4.14
MICROB_N: USB2.2
MICROB_P: USB2.3
MISO1: IC2.40
MOSI1: IC2.41 U$2.P$11
N$1: FB2.1 U4.10
N$2: IC3.4 J1.19 Q2.1
N$3: U$7.P$2 U$43.1
N$4: LED1.1 R23.2
N$5: C35.1 U10.6
N$6: FB1.1 U4.9
N$7: D2.A L2.1 U5.1
N$8: C17.1 C19.1 D2.C D4.C R6.1
N$9: IC3.1 J1.13 Q1.3
N$10: JP1.2 U$2.P$50
N$11: JP2.2 U$2.P$49
N$12: JP3.2 U$2.P$48
N$13: IC2.6 R51.2 U$36.3
N$14: C20.1 R11.1 U7.P$1 U7.P$20
N$16: IC2.29 R8.1
N$17: LED1.2 R22.2
N$18: LED1.3 R17.2
N$20: R19.1 R21.1 U7.P$2
N$21: R23.1 U7.P$7
N$22: R1.1 U2.1 U$2.P$8
N$23: R24.2 U7.P$13
N$24: THERM.2 U7.P$5
N$27: R25.2 U7.P$12
N$32: R3.2 U$2.P$10
N$38: R35.1 S16.1
N$39: R15.2 S16.3
N$40: IC2.5 R51.1 U$36.1
N$44: C34.1 R55.1 U8.12
N$45: L1.2 U10.1 U10.2
N$46: C21.1 C31.1 C33.1 C36.1 R37.2 R38.2 R40.1 U10.3 U10.4
N$47: SD1.9
N$48: C21.2 R36.2 R37.1 U10.7
N$51: L4.1 U8.2
N$52: L3.1 U8.8
N@1: J3.33
N@2: J3.35
N@3: J3.63
N@4: J3.65
PCLK: J3.3 U$2.P$38
R0: U$2.P$28
R1: U$2.P$29
R2: J3.15 U$2.P$30
R3: J3.17 U$2.P$31
R4: J3.21 U$2.P$32
R5: J3.23 U$2.P$33
R6: J3.27 U$2.P$34
R7: J3.29 U$2.P$35
RPI_USB_N [diff_pair]: J3.167 U$42.9
RPI_USB_P [diff_pair]: J3.165 U$42.10
RPIO: J3.82 R8.2 R28.1
RST: C2.1 IC2.7 J3.54 R50.1 S5.2 TP11.P$1
RUN: J3.177
RXD0: IC2.30 J3.60 TP5.P$1
S1: IC2.19 S6.X
S2: IC2.18 S6.Y
SCK1: IC2.39 R3.1
SD_MODE: R7.1 U4.4
SDX_CLK: J3.10 SD1.5
SDX_CMD: J3.12 SD1.3
SDX_D0: J3.16 SD1.7
SDX_D1: J3.18 SD1.8
SDX_D2: J3.22 SD1.1
SDX_D3: J3.24 SD1.2
SDX_VDD: C23.1 J3.4 J3.6 R20.1
SELECT: IC2.22 U$44.1
SPENA: IC2.43 U$2.P$9
START: IC2.21 U$44.3
STM_N: C11.2 IC2.32 R52.2
STM_P: C10.2 IC2.33 R53.2 R54.2
STM_USB_N [diff_pair]: R52.1 U$42.1
STM_USB_P [diff_pair]: R53.1 U$42.2
SWLOCK: IC2.20 R12.2 U$8.1
SWSPRING: IC2.10 R4.2 U$8.4
TFT_EN: IC2.46 R16.2 TP2.P$1 U5.4
TLEFT: IC2.38 U$35.A
TRIGHT: IC2.11 U$34.A
TVDAC: J3.166
TXD0: IC2.31 J3.58 TP4.P$1
USB_N [diff_pair]: P1.2 U$42.7
USB_OTGID: J3.168
USB_P [diff_pair]: P1.3 U$42.6
VBAT: C16.1 C25.1 C32.1 L1.1 L2.2 R11.2 R35.2 U5.5 U6.1 U10.10
VBUS: C1.1 LED1.4 R19.2 U7.P$3 U7.P$4 U7.P$9 U7.P$17 U7.P$18 U7.P$19 USB2.1
VCC-ISO: C37.1 IC3.3 J1.18 Q1.1 R41.2 R42.2 U3.2
VCCIO: C3.1 C4.1 C12.1 C26.1 C27.1 C38.1 C39.1 IC2.9 IC2.24 IC2.36 IC2.48 R13.2 R50.2 R54.1 RN4.1 RN4.2 RN4.3 RN4.4 RN5.1 RN5.2 RN5.3 RN5.4 S6.VCC S7.VCC TP3.P$1 U6.5 U12.15 U12.16 U$8.3 U$32.1
VLIPO: C13.1 U7.P$14 U7.P$15 U7.P$16 U$24.P$2
VO+: C15.1 FB1.2 U$43.2
VO-: C14.1 FB2.2 U$7.P$1
X: RN5.7 S10.1 U12.3 X.B
XL: U$2.P$44
XR: U$2.P$6
Y: RN5.8 S11.1 U12.4 Y.B
YD: U$2.P$43
YU: U$2.P$5